# Altium PCB pcb.PCBDOC (part 4 of 4)
Units mil, origin at the board's own origin, x right, y up, seen from the top; angles counter-clockwise.
Board outline 6250 x 3000 mil, 6 copper layers (Top Layer, Internal Plane 1, Mid-Layer 1, Mid-Layer 2, Internal Plane 2, Bottom Layer); 189 components, 357 nets, 1696 pads, 997 vias.
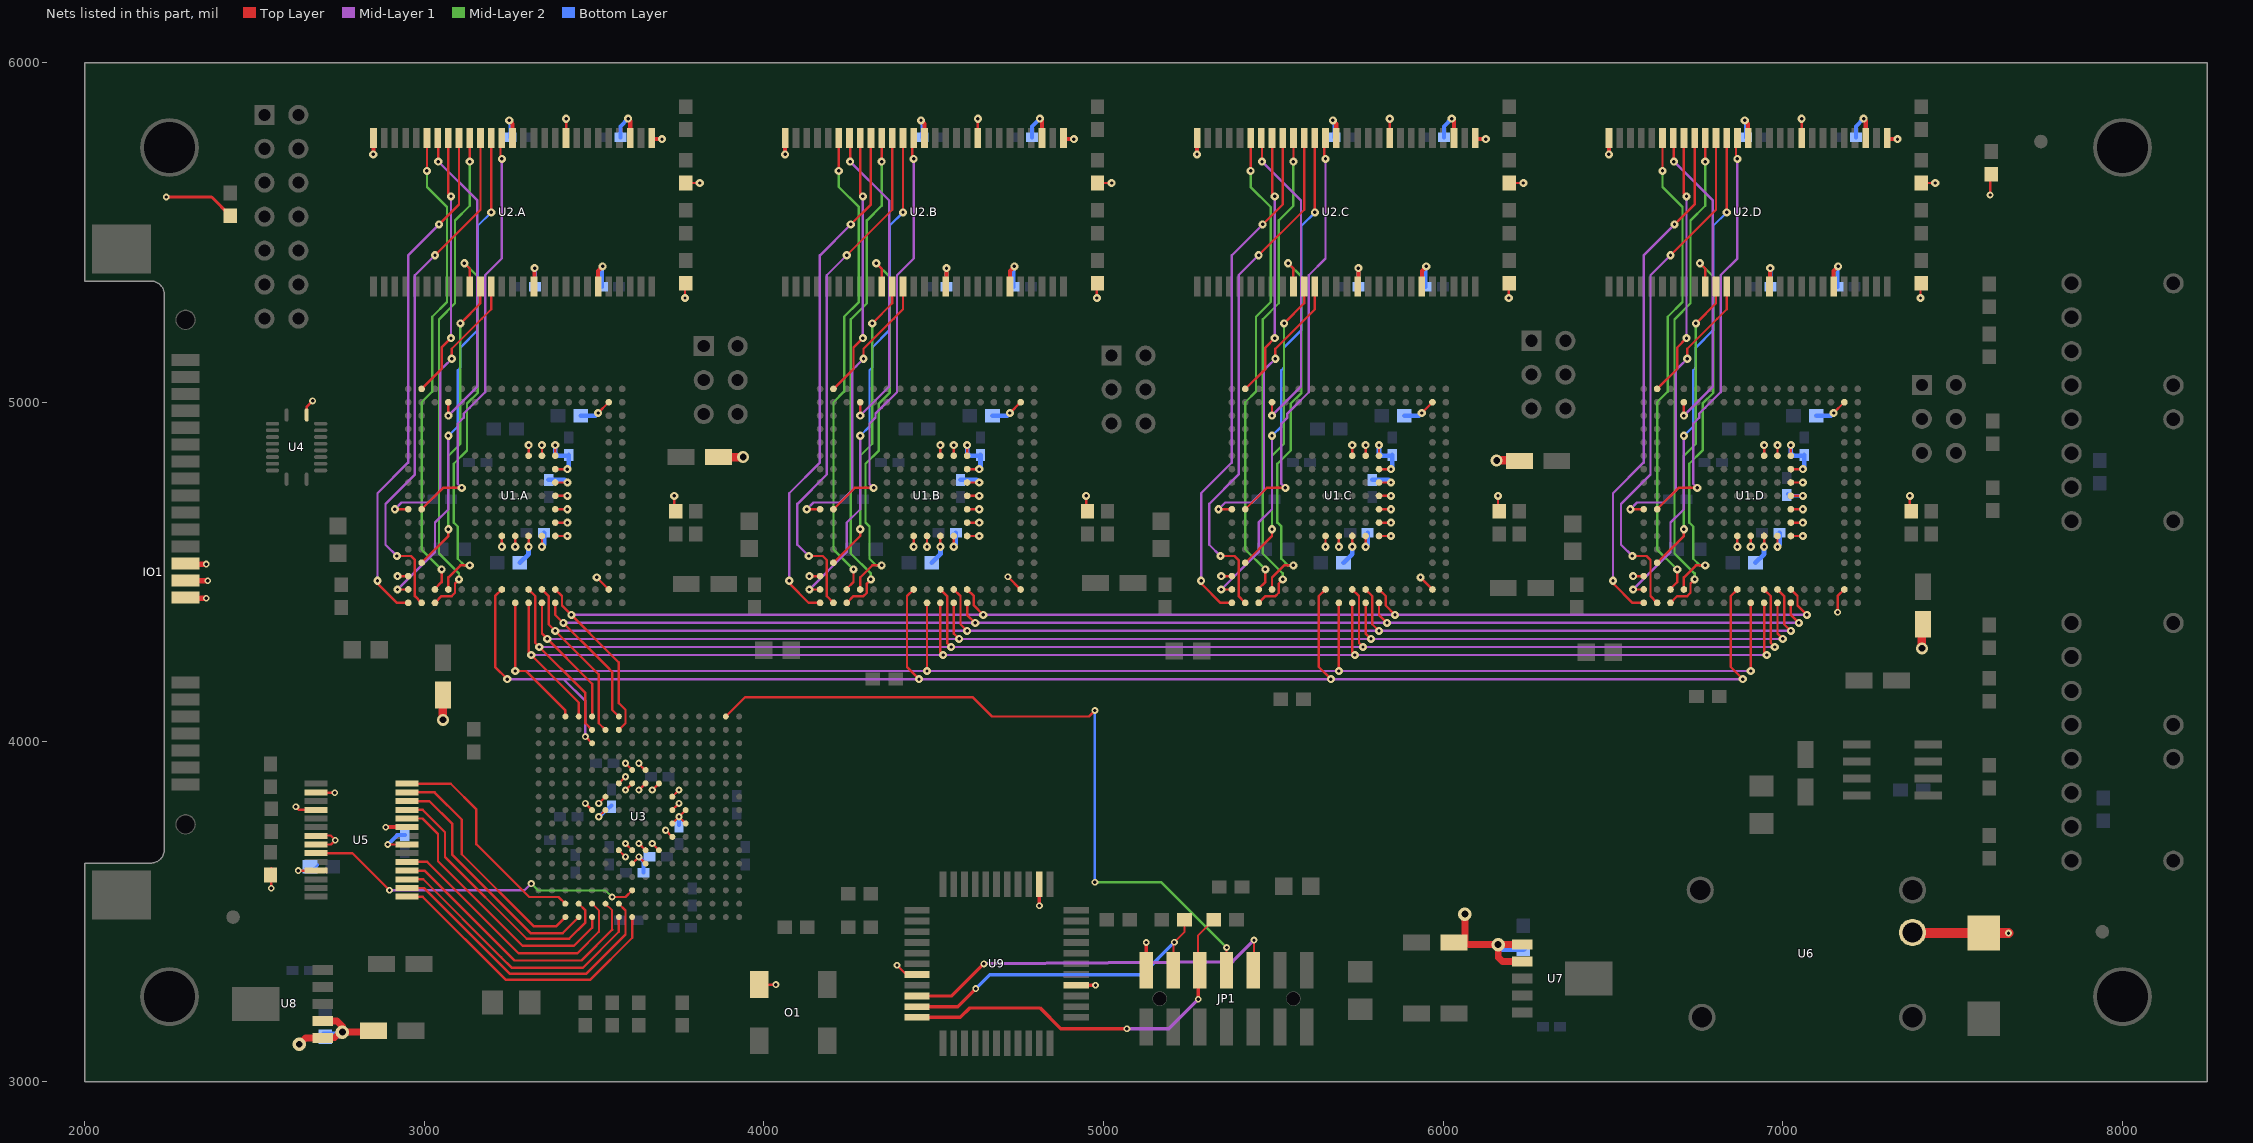
[diagram p8: the nets of this part, all layers, seen from the top]

## Via types
v1: diameter 24, hole 10, Top Layer to Bottom Layer, tented top, 281 vias
v2: diameter 24, hole 10, Top Layer to Bottom Layer, 250 vias
v3: diameter 20, hole 10, Top Layer to Bottom Layer, 211 vias
v4: diameter 21.2, hole 10, Top Layer to Bottom Layer, tented top, 109 vias
v5: diameter 20, hole 10, Top Layer to Bottom Layer, tented top, 96 vias
v6: diameter 40, hole 20, Top Layer to Bottom Layer, 25 vias
v7: diameter 25, hole 15, Top Layer to Bottom Layer, 9 vias
v8: diameter 35, hole 20, Top Layer to Bottom Layer, 8 vias
v9: diameter 40, hole 25, Top Layer to Bottom Layer, 8 vias

## Nets (pads, with @x,y where several pads share a name; then routed paths per layer and width w, separated by ;. In a path a pad name is that pad's centre, name@x,y a point inside that pad or via, vN(x,y) a via of type N, cw(c..) or ccw(c..) an arc to the next point about the centre after c; other vN are vias at no path point) (continued)
PPI1: U1.A.A9 U1.B.A9 U1.C.A9 U1.D.A9 U3.A3 | length 4654.4
  Top Layer w7: U1.A.A9@3267.72,4409.45 v2(3267.72,4208.66) 3299.21,4208.66 3415.35,4092.52 U3.A3@3415.35,4074.8 ; v2(4480.31,4208.66) U1.B.A9@4480.31,4409.45 ; v2(5692.91,4208.66) U1.C.A9@5692.91,4409.45 ; v2(6905.51,4208.66) U1.D.A9@6905.51,4409.45
  Mid-Layer 1 w7: v2(3267.72,4208.66) 3610.24,4208.66 v2(6905.51,4208.66)
PPI2: U1.A.B8 U1.B.B8 U1.C.B8 U1.D.B8 U3.B5 | length 4675.7
  Top Layer w7: U1.A.B8@3307.09,4448.82 3326.77,4429.13 3326.77,4291.34 3474.41,4143.7 3474.41,4055.12 U3.B5@3494.09,4035.43 ; U1.B.B8@4519.68,4448.82 4539.37,4429.13 4539.37,4291.34 v2(4551.18,4279.53) ; U1.C.B8@5732.28,4448.82 5751.97,4429.13 5751.97,4291.34 v2(5763.78,4279.53) ; U1.D.B8@6944.88,4448.82 6964.57,4429.13 6964.57,4291.34 v2(6976.38,4279.53)
  Mid-Layer 1 w7: v2(3338.58,4279.53) v2(6976.38,4279.53)
PPI3: U1.A.A8 U1.B.A8 U1.C.A8 U1.D.A8 U3.A4 | length 4504
  Top Layer w7: U1.A.A8@3307.09,4409.45 3307.09,4263.78 3454.72,4116.14 U3.A4@3454.72,4074.8 ; U1.B.A8@4519.68,4409.45 4519.68,4263.78 v2(4527.56,4255.91) ; U1.C.A8@5732.28,4409.45 5732.28,4263.78 v2(5740.16,4255.91) ; U1.D.A8@6944.88,4409.45 6944.88,4263.78 v2(6952.76,4255.91)
  Mid-Layer 1 w7: v2(3314.96,4255.91) v2(6952.76,4255.91)
PPI4: U1.A.B7 U1.B.B7 U1.C.B7 U1.D.B7 U3.B6 | length 4543.7
  Top Layer w7: U1.A.B7@3346.46,4448.82 3366.14,4429.13 3366.14,4346.46 3513.78,4198.82 3513.78,4055.12 U3.B6@3533.46,4035.43 ; U1.B.B7@4559.05,4448.82 4578.74,4429.13 4578.74,4346.46 v2(4598.43,4326.77) ; U1.C.B7@5771.65,4448.82 5791.34,4429.13 5791.34,4346.46 v2(5811.02,4326.77) ; U1.D.B7@6984.25,4448.82 7003.94,4429.13 7003.94,4346.46 v2(7023.62,4326.77)
  Mid-Layer 1 w7: v2(3385.83,4326.77) v2(7023.62,4326.77)
PPI5: U1.A.A7 U1.B.A7 U1.C.A7 U1.D.A7 U3.A5 | length 4372.1
  Top Layer w7: U1.A.A7@3346.46,4409.45 3346.46,4318.9 3494.09,4171.26 U3.A5@3494.09,4074.8 ; U1.B.A7@4559.05,4409.45 4559.06,4318.9 v2(4574.8,4303.15) ; U1.C.A7@5771.65,4409.45 5771.65,4318.9 v2(5787.4,4303.15) ; U1.D.A7@6984.25,4409.45 6984.25,4318.9 v2(7000,4303.15)
  Mid-Layer 1 w7: v2(3362.2,4303.15) v2(7000,4303.15)
PPI6: U1.A.B6 U1.B.B6 U1.C.B6 U1.D.B6 U3.B7 | length 4428.1
  Top Layer w7: U1.A.B6@3385.83,4448.82 3405.51,4429.13 3405.51,4401.57 3572.83,4234.25 3572.83,4114.17 3592.52,4094.49 3592.52,4055.12 U3.B7@3572.83,4035.43 ; U1.B.B6@4598.42,4448.82 4618.11,4429.13 4618.11,4401.57 v1(4645.67,4374.02) ; U1.C.B6@5811.02,4448.82 5830.71,4429.13 5830.71,4401.57 v1(5858.27,4374.02) ; U1.D.B6@7023.62,4448.82 7043.31,4429.13 7043.31,4401.57 v1(7070.87,4374.02)
  Mid-Layer 1 w7: v1(3433.07,4374.02) v1(7070.87,4374.02)
PPI7: U1.A.A6 U1.B.A6 U1.C.A6 U1.D.A6 U3.A7 | length 4256.4
  Top Layer w7: U1.A.A6@3385.83,4409.45 3385.83,4374.02 3539.44,4220.41 3553.15,4206.69 3553.15,4094.49 U3.A7@3572.83,4074.8 ; U1.B.A6@4598.42,4409.45 4598.42,4374.02 v1(4622.05,4350.39) ; U1.C.A6@5811.02,4409.45 5811.02,4374.02 v2(5834.65,4350.39) ; U1.D.A6@7023.62,4409.45 7023.62,4374.02 v1(7047.24,4350.39)
  Mid-Layer 1 w7: v1(3409.45,4350.39) v1(7047.24,4350.39)
PPICLK: U1.A.B10 U1.B.B10 U1.C.B10 U1.D.B10 U3.C5 | length 5008.3
  Top Layer w7: U1.A.B10@3228.35,4448.82 3208.66,4429.13 3208.66,4220.47 v2(3244.09,4185.04) ; v4(3474.41,4015.75) U3.C5@3494.09,3996.06 ; U1.B.B10@4440.94,4448.82 4421.26,4429.13 4421.26,4220.47 v2(4456.69,4185.04) ; U1.C.B10@5653.54,4448.82 5633.86,4429.13 5633.86,4220.47 v2(5669.29,4185.04) ; U1.D.B10@6866.14,4448.82 6846.46,4429.13 6846.46,4220.47 v2(6881.89,4185.04)
  Mid-Layer 1 w7: v2(3244.09,4185.04) v2(6881.89,4185.04) ; 3409.45,4185.04 3474.41,4120.08 v4(3474.41,4015.75)
RXCLK: U3.P8 U5.9 | length 1009
  Top Layer w7: U5.9@2681.1,3672.24 2788.39,3672.24 v3(2897.64,3562.99) ; v4(3553.15,3543.31) 3592.52,3543.31 U3.P8@3612.2,3562.99
  Mid-Layer 1 w7: v3(2897.64,3562.99) 3289.37,3562.99 3295.28,3562.99 v4(3314.96,3582.68)
  Mid-Layer 2 w6: 3334.65,3562.99 3533.47,3562.99 v4(3553.15,3543.31)
  Mid-Layer 2 w7: v4(3314.96,3582.68) 3334.65,3562.99
RXDAT0: U3.R3 U5.28 | length 672.9
  Top Layer w7: U5.28@2948.82,3876.97 3077.76,3876.97 3153.54,3801.18 3153.54,3698.82 3309.06,3543.31 3395.67,3543.31 U3.R3@3415.35,3523.62
RXDAT1: U3.T3 U5.27 | length 701.4
  Top Layer w7: U5.27@2948.82,3851.38 3030.51,3851.38 3110.24,3771.65 3110.24,3669.29 3322.83,3456.69 3387.8,3456.69 U3.T3@3415.35,3484.25
RXDAT2: U3.T4 U5.26 | length 739.6
  Top Layer w7: U5.26@2948.82,3825.79 3014.76,3825.79 3082.68,3757.87 3082.68,3667.32 3312.99,3437.01 3407.48,3437.01 U3.T4@3454.72,3484.25
RXDAT3: U3.R4 U5.25 | length 808.6
  Top Layer w7: U5.25@2948.82,3800.2 2995.08,3800.2 3061.02,3734.25 3061.02,3661.42 3301.84,3420.6 3426.51,3420.6 3474.41,3468.5 3474.41,3503.94 U3.R4@3454.72,3523.62
RXDAT4: U3.T5 U5.24 | length 801.4
  Top Layer w7: U5.24@2948.82,3774.61 2995.08,3774.61 3040.48,3729.21 3040.48,3648.5 3289.37,3399.61 3440.94,3399.61 3494.09,3452.76 U3.T5@3494.09,3484.25
RXDAT5: U3.R5 U5.19 | length 793.2
  Top Layer w6: U3.R5@3494.09,3523.62 3513.78,3503.94 3513.78,3440.94
  Top Layer w7: U5.19@2948.82,3646.65 3008.86,3646.65 3277.56,3377.95 3450.79,3377.95 3513.78,3440.94
RXDAT6: U3.R6 U5.18 | length 836.4
  Top Layer w6: U3.R6@3533.46,3523.62 3553.15,3503.94 3553.15,3446.85
  Top Layer w7: U5.18@2948.82,3621.06 3000.98,3621.06 3265.75,3356.3 3462.6,3356.3 3553.15,3446.85
RXDAT7: U3.T7 U5.17 | length 819.4
  Top Layer w7: U5.17@2948.82,3595.47 2997.05,3595.47 3226.38,3366.14 3257.87,3334.65 3466.54,3334.65 3572.83,3440.94 U3.T7@3572.83,3484.25
RXDAT8: U3.R7 U5.16 | length 895.3
  Top Layer w7: U5.16@2948.82,3569.88 2999.02,3569.88 3251.97,3316.93 3476.38,3316.93 3592.52,3433.07 3592.52,3503.94 U3.R7@3572.83,3523.62
RXDAT9: U3.T8 U5.15 | length 877.3
  Top Layer w7: U5.15@2948.82,3544.29 2995.08,3544.29 3240.16,3299.21 3488.19,3299.21 3612.2,3423.23 U3.T8@3612.2,3484.25
S\C\A\S\.A: U1.A.A16 U2.A.17 | length 1553.2
  Top Layer w7: v1(2919.29,4547.24) 2960.63,4547.24 2972.44,4535.43 2972.44,4429.13 U1.A.A16@2992.13,4409.45 ; v2(3031.5,5433.07) 3165.51,5567.09 U2.A.17@3165.51,5778.5
  Mid-Layer 1 w7: v1(2919.29,4547.24) 2885.83,4580.71 2885.83,4700.79 2972.44,4787.4 2972.44,5374.02 v2(3031.5,5433.07)
S\C\A\S\.B: U1.B.A16 U2.B.17 | length 1553.2
  Top Layer w7: v1(4131.89,4547.24) 4173.23,4547.24 4185.04,4535.43 4185.04,4429.13 U1.B.A16@4204.72,4409.45 ; v2(4244.09,5433.07) 4378.11,5567.09 U2.B.17@4378.11,5778.5
  Mid-Layer 1 w7: v1(4131.89,4547.24) 4098.43,4580.71 4098.43,4700.79 4185.04,4787.4 4185.04,5374.02 v2(4244.09,5433.07)
S\C\A\S\.C: U1.C.A16 U2.C.17 | length 1553.2
  Top Layer w7: v1(5344.49,4547.24) 5385.83,4547.24 5397.64,4535.43 5397.64,4429.13 U1.C.A16@5417.32,4409.45 ; v2(5456.69,5433.07) 5590.71,5567.09 U2.C.17@5590.71,5778.5
  Mid-Layer 1 w7: v1(5344.49,4547.24) 5311.02,4580.71 5311.02,4700.79 5397.64,4787.4 5397.64,5374.02 v2(5456.69,5433.07)
S\C\A\S\.D: U1.D.A16 U2.D.17 | length 1553.2
  Top Layer w7: v1(6557.09,4547.24) 6598.43,4547.24 6610.24,4535.43 6610.24,4429.13 U1.D.A16@6629.92,4409.45 ; v2(6669.29,5433.07) 6803.31,5567.09 U2.D.17@6803.31,5778.5
  Mid-Layer 1 w7: v1(6557.09,4547.24) 6523.62,4580.71 6523.62,4700.79 6610.24,4787.4 6610.24,5374.02 v2(6669.29,5433.07)
S\C\K\E\.A: U1.A.B14 U2.A.37 | length 1155
  Top Layer w7: U1.A.B14@3070.87,4448.82 3070.87,4484.25 3106.3,4519.69 v1(3133.86,4519.69) ; v2(3118.11,5409.45) 3133.86,5393.7 U2.A.37@3133.86,5342.52
  Mid-Layer 2 w7: v2(3118.11,5409.45) 3157.48,5370.08 3157.48,5027.56 3125.98,4996.06 3125.98,4858.27 3086.61,4818.9 3086.61,4645.67 3098.43,4633.86 3098.43,4539.37 3118.11,4519.69 v1(3133.86,4519.69) ; v1@3132.87,4518.7 v1@3135.83,4515.75
S\C\K\E\.B: U1.B.B14 U2.B.37 | length 1155
  Top Layer w7: U1.B.B14@4283.46,4448.82 4283.46,4484.25 4318.9,4519.69 v1(4346.46,4519.69) ; v2(4330.71,5409.45) 4346.46,5393.7 U2.B.37@4346.46,5342.52
  Mid-Layer 2 w7: v2(4330.71,5409.45) 4370.08,5370.08 4370.08,5027.56 4338.58,4996.06 4338.58,4858.27 4299.21,4818.9 4299.21,4645.67 4311.02,4633.86 4311.02,4539.37 4330.71,4519.69 v1(4346.46,4519.69) ; v1@4345.47,4518.7 v1@4348.43,4515.75
S\C\K\E\.C: U1.C.B14 U2.C.37 | length 1155
  Top Layer w7: U1.C.B14@5496.06,4448.82 5496.06,4484.25 5531.5,4519.69 v1(5559.06,4519.69) ; v2(5543.31,5409.45) 5559.06,5393.7 U2.C.37@5559.06,5342.52
  Mid-Layer 2 w7: v2(5543.31,5409.45) 5582.68,5370.08 5582.68,5027.56 5551.18,4996.06 5551.18,4858.27 5511.81,4818.9 5511.81,4645.67 5523.62,4633.86 5523.62,4539.37 5543.31,4519.69 v1(5559.06,4519.69) ; v1@5558.07,4518.7 v1@5561.02,4515.75
S\C\K\E\.D: U1.D.B14 U2.D.37 | length 1155
  Top Layer w7: U1.D.B14@6708.66,4448.82 6708.66,4484.25 6744.09,4519.69 v1(6771.65,4519.69) ; v2(6755.91,5409.45) 6771.65,5393.7 U2.D.37@6771.65,5342.52
  Mid-Layer 2 w7: v2(6755.91,5409.45) 6795.28,5370.08 6795.28,5027.56 6763.78,4996.06 6763.78,4858.27 6724.41,4818.9 6724.41,4645.67 6736.22,4633.86 6736.22,4539.37 6755.91,4519.69 v1(6771.65,4519.69) ; v1@6770.67,4518.7 v1@6773.62,4515.75
S\M\S\.A: U1.A.A17 U2.A.19 | length 1530.8
  Top Layer w7: v2@2864.17,4480.31 2864.17,4464.57 2919.29,4409.45 U1.A.A17@2952.76,4409.45 ; v2(3043.31,5523.62) 3102.36,5582.68 3102.36,5778.35 U2.A.19@3102.52,5778.5
  Mid-Layer 1 w7: v2(2862.2,4474.41) 2862.2,4732.28 2952.28,4822.35 2952.28,5432.59 v2(3043.31,5523.62)
S\M\S\.B: U1.B.A17 U2.B.19 | length 1530.8
  Top Layer w7: v2@4076.77,4480.31 4076.77,4464.57 4131.89,4409.45 U1.B.A17@4165.35,4409.45 ; v2(4255.91,5523.62) 4314.96,5582.68 4314.96,5778.35 U2.B.19@4315.12,5778.5
  Mid-Layer 1 w7: v2(4074.8,4474.41) 4074.8,4732.28 4164.87,4822.35 4164.87,5432.59 v2(4255.91,5523.62)
S\M\S\.C: U1.C.A17 U2.C.19 | length 1530.8
  Top Layer w7: v2@5289.37,4480.31 5289.37,4464.57 5344.49,4409.45 U1.C.A17@5377.95,4409.45 ; v2(5468.5,5523.62) 5527.56,5582.68 5527.56,5778.35 U2.C.19@5527.72,5778.5
  Mid-Layer 1 w7: v2(5287.4,4474.41) 5287.4,4732.28 5377.47,4822.35 5377.47,5432.59 v2(5468.5,5523.62)
S\M\S\.D: U1.D.A17 U2.D.19 | length 1530.8
  Top Layer w7: v1@6501.97,4480.31 6501.97,4464.57 6557.09,4409.45 U1.D.A17@6590.55,4409.45 ; v2(6681.1,5523.62) 6740.16,5582.68 6740.16,5778.35 U2.D.19@6740.32,5778.5
  Mid-Layer 1 w7: v1(6500,4474.41) 6500,4732.28 6590.07,4822.35 6590.07,5432.59 v2(6681.1,5523.62)
S\R\A\S\.A: U1.A.A15 U2.A.18 | length 1481.5
  Top Layer w7: U1.A.A15@3031.5,4409.45 3051.18,4429.13 3080.71,4429.13 3090.55,4438.98 3090.55,4466.54 v1(3102.36,4478.35) ; v2@3134.02,5708.82 U2.A.18@3134.02,5778.5
  Mid-Layer 2 w7: v1@3098.43,4478.35 v1(3102.36,4478.35) 3102.36,4496.06 3043.31,4555.12 3043.31,5244.09 3090.55,5291.34 3090.55,5535.43 3133.86,5578.74 v2(3133.86,5708.66)
S\R\A\S\.B: U1.B.A15 U2.B.18 | length 1481.5
  Top Layer w7: U1.B.A15@4244.09,4409.45 4263.78,4429.13 4293.31,4429.13 4303.15,4438.98 4303.15,4466.54 v1(4314.96,4478.35) ; v2@4346.61,5708.82 U2.B.18@4346.61,5778.5
  Mid-Layer 2 w7: v1@4311.02,4478.35 v1(4314.96,4478.35) 4314.96,4496.06 4255.91,4555.12 4255.91,5244.09 4303.15,5291.34 4303.15,5535.43 4346.46,5578.74 v2(4346.46,5708.66)
S\R\A\S\.C: U1.C.A15 U2.C.18 | length 1481.5
  Top Layer w7: U1.C.A15@5456.69,4409.45 5476.38,4429.13 5505.91,4429.13 5515.75,4438.98 5515.75,4466.54 v1(5527.56,4478.35) ; v2@5559.21,5708.82 U2.C.18@5559.21,5778.5
  Mid-Layer 2 w7: v1@5523.62,4478.35 v1(5527.56,4478.35) 5527.56,4496.06 5468.5,4555.12 5468.5,5244.09 5515.75,5291.34 5515.75,5535.43 5559.06,5578.74 v2(5559.06,5708.66)
S\R\A\S\.D: U1.D.A15 U2.D.18 | length 1481.5
  Top Layer w7: U1.D.A15@6669.29,4409.45 6688.98,4429.13 6718.5,4429.13 6728.35,4438.98 6728.35,4466.54 v1(6740.16,4478.35) ; v2@6771.81,5708.82 U2.D.18@6771.81,5778.5
  Mid-Layer 2 w7: v1@6736.22,4478.35 v1(6740.16,4478.35) 6740.16,4496.06 6681.1,4555.12 6681.1,5244.09 6728.35,5291.34 6728.35,5535.43 6771.65,5578.74 v2(6771.65,5708.66)
S\W\E\.A: U1.A.B17 U2.A.16 | length 1475.4
  Top Layer w7: v1(2921.26,4448.82) U1.A.B17@2952.76,4448.82 ; v2(3197.01,5559.21) U2.A.16@3197.01,5778.5
  Mid-Layer 1 w7: v1(2921.26,4448.82) 3031.5,4559.05 3031.5,4645.67 3070.87,4685.04 v1(3070.87,4901.57)
  Bottom Layer w7: v1(3070.87,4901.57) 3098.43,4929.13 3098.43,5094.49 3106.3,5102.36 3106.3,5161.42 3157.48,5212.6 3157.48,5519.69 v2(3197.01,5559.21)
S\W\E\.B: U1.B.B17 U2.B.16 | length 1475.4
  Top Layer w7: v1(4133.86,4448.82) U1.B.B17@4165.35,4448.82 ; v2(4409.61,5559.21) U2.B.16@4409.61,5778.5
  Mid-Layer 1 w7: v1(4133.86,4448.82) 4244.09,4559.05 4244.09,4645.67 4283.46,4685.04 v1(4283.46,4901.57)
  Bottom Layer w7: v1(4283.46,4901.57) 4311.02,4929.13 4311.02,5094.49 4318.9,5102.36 4318.9,5161.42 4370.08,5212.6 4370.08,5519.69 v2(4409.61,5559.21)
S\W\E\.C: U1.C.B17 U2.C.16 | length 1475.4
  Top Layer w7: v1(5346.46,4448.82) U1.C.B17@5377.95,4448.82 ; v2(5622.2,5559.21) U2.C.16@5622.2,5778.5
  Mid-Layer 1 w7: v1(5346.46,4448.82) 5456.69,4559.05 5456.69,4645.67 5496.06,4685.04 v1(5496.06,4901.57)
  Bottom Layer w7: v1(5496.06,4901.57) 5523.62,4929.13 5523.62,5094.49 5531.5,5102.36 5531.5,5161.42 5582.68,5212.6 5582.68,5519.69 v2(5622.2,5559.21)
S\W\E\.D: U1.D.B17 U2.D.16 | length 1475.4
  Top Layer w7: v1(6559.06,4448.82) U1.D.B17@6590.55,4448.82 ; v2(6834.8,5559.21) U2.D.16@6834.8,5778.5
  Mid-Layer 1 w7: v1(6559.06,4448.82) 6669.29,4559.05 6669.29,4645.67 6708.66,4685.04 v1(6708.66,4901.57)
  Bottom Layer w7: v1(6708.66,4901.57) 6736.22,4929.13 6736.22,5094.49 6744.09,5102.36 6744.09,5161.42 6795.28,5212.6 6795.28,5519.69 v2(6834.8,5559.21)
SA10.A: U1.A.B15 U2.A.22 | length 1415.8
  Top Layer w7: v2(3007.87,5681.1) 3008.03,5681.26 U2.A.22@3008.03,5778.5 ; U1.A.B15@3031.5,4450.79 3051.18,4470.47 v1(3051.18,4507.87)
  Mid-Layer 2 w7: v2(3007.87,5681.1) 3007.87,5633.86 3066.93,5574.8 3066.93,5295.28 3023.62,5251.97 3023.62,5031.5 2992.13,5000 2992.13,4566.93 v1(3051.18,4507.87)
SA10.B: U1.B.B15 U2.B.22 | length 1415.8
  Top Layer w7: v2(4220.47,5681.1) 4220.63,5681.26 U2.B.22@4220.63,5778.5 ; U1.B.B15@4244.09,4450.79 4263.78,4470.47 v1(4263.78,4507.87)
  Mid-Layer 2 w7: v2(4220.47,5681.1) 4220.47,5633.86 4279.53,5574.8 4279.53,5295.28 4236.22,5251.97 4236.22,5031.5 4204.72,5000 4204.72,4566.93 v1(4263.78,4507.87)
SA10.C: U1.C.B15 U2.C.22 | length 1415.8
  Top Layer w7: v2(5433.07,5681.1) 5433.23,5681.26 U2.C.22@5433.23,5778.5 ; U1.C.B15@5456.69,4450.79 5476.38,4470.47 v1(5476.38,4507.87)
  Mid-Layer 2 w7: v2(5433.07,5681.1) 5433.07,5633.86 5492.13,5574.8 5492.13,5295.28 5448.82,5251.97 5448.82,5031.5 5417.32,5000 5417.32,4566.93 v1(5476.38,4507.87)
SA10.D: U1.D.B15 U2.D.22 | length 1415.8
  Top Layer w7: v2(6645.67,5681.1) 6645.83,5681.26 U2.D.22@6645.83,5778.5 ; U1.D.B15@6669.29,4450.79 6688.98,4470.47 v1(6688.98,4507.87)
  Mid-Layer 2 w7: v2(6645.67,5681.1) 6645.67,5633.86 6704.72,5574.8 6704.72,5295.28 6661.42,5251.97 6661.42,5031.5 6629.92,5000 6629.92,4566.93 v1(6688.98,4507.87)
SB0.A: U1.A.U16 U2.A.20 | length 778.2
  Top Layer w7: U1.A.U16@2992.13,5039.37 3051.18,5098.43 3051.18,5161.42 v2(3078.74,5188.98) ; U2.A.20@3071.02,5778.5 3071.02,5614.02 v2(3078.74,5606.3)
  Mid-Layer 1 w7: v2(3078.74,5188.98) v2(3078.74,5606.3)
SB0.B: U1.B.U16 U2.B.20 | length 778.2
  Top Layer w7: U1.B.U16@4204.72,5039.37 4263.78,5098.43 4263.78,5161.42 v2(4291.34,5188.98) ; U2.B.20@4283.62,5778.5 4283.62,5614.02 v2(4291.34,5606.3)
  Mid-Layer 1 w7: v2(4291.34,5188.98) v2(4291.34,5606.3)
SB0.C: U1.C.U16 U2.C.20 | length 778.2
  Top Layer w7: U1.C.U16@5417.32,5039.37 5476.38,5098.43 5476.38,5161.42 v2(5503.94,5188.98) ; U2.C.20@5496.22,5778.5 5496.22,5614.02 v2(5503.94,5606.3)
  Mid-Layer 1 w7: v2(5503.94,5188.98) v2(5503.94,5606.3)
SB0.D: U1.D.U16 U2.D.20 | length 778.2
  Top Layer w7: U1.D.U16@6629.92,5039.37 6688.98,5098.43 6688.98,5161.42 v2(6716.54,5188.98) ; U2.D.20@6708.82,5778.5 6708.82,5614.02 v2(6716.54,5606.3)
  Mid-Layer 1 w7: v2(6716.54,5188.98) v2(6716.54,5606.3)
SB1.A: U1.A.T14 U2.A.21 | length 949.1
  Top Layer w7: v2(3041.34,5708.66) U2.A.21@3041.34,5787.4 ; v1(3070.87,4960.63) U1.A.T14@3070.87,5000
  Mid-Layer 1 w7: v2(3041.34,5708.66) 3156.29,5593.71 3156.29,5046.06 v1(3070.87,4960.63)
SB1.B: U1.B.T14 U2.B.21 | length 949.1
  Top Layer w7: v2(4253.94,5708.66) U2.B.21@4253.94,5787.4 ; v1(4283.46,4960.63) U1.B.T14@4283.46,5000
  Mid-Layer 1 w7: v2(4253.94,5708.66) 4368.89,5593.71 4368.89,5046.06 v1(4283.46,4960.63)
SB1.C: U1.C.T14 U2.C.21 | length 949.1
  Top Layer w7: v2(5466.54,5708.66) U2.C.21@5466.54,5787.4 ; v1(5496.06,4960.63) U1.C.T14@5496.06,5000
  Mid-Layer 1 w7: v2(5466.54,5708.66) 5581.49,5593.71 5581.49,5046.06 v1(5496.06,4960.63)
SB1.D: U1.D.T14 U2.D.21 | length 949.1
  Top Layer w7: v2(6679.13,5708.66) U2.D.21@6679.13,5787.4 ; v1(6708.66,4960.63) U1.D.T14@6708.66,5000
  Mid-Layer 1 w7: v2(6679.13,5708.66) 6794.09,5593.71 6794.09,5046.06 v1(6708.66,4960.63)
SCLK.A: U1.A.D16 U2.A.38 | length 886.7
  Top Layer w7: U1.A.D16@2992.13,4527.56 3070.87,4606.3 v1(3070.87,4625.98) ; v2(3106.3,5232.28) 3165.35,5291.34 U2.A.38@3165.35,5342.52
  Mid-Layer 2 w7: v1(3070.87,4625.98) 3070.87,4842.52 3106.3,4877.95 v2(3106.3,5232.28)
SCLK.B: U1.B.D16 U2.B.38 | length 886.7
  Top Layer w7: U1.B.D16@4204.72,4527.56 4283.46,4606.3 v1(4283.46,4625.98) ; v2(4318.9,5232.28) 4377.95,5291.34 U2.B.38@4377.95,5342.52
  Mid-Layer 2 w7: v1(4283.46,4625.98) 4283.46,4842.52 4318.9,4877.95 v2(4318.9,5232.28)
SCLK.C: U1.C.D16 U2.C.38 | length 886.7
  Top Layer w7: U1.C.D16@5417.32,4527.56 5496.06,4606.3 v1(5496.06,4625.98) ; v2(5531.5,5232.28) 5590.55,5291.34 U2.C.38@5590.55,5342.52
  Mid-Layer 2 w7: v1(5496.06,4625.98) 5496.06,4842.52 5531.5,4877.95 v2(5531.5,5232.28)
SCLK.D: U1.D.D16 U2.D.38 | length 886.7
  Top Layer w7: U1.D.D16@6629.92,4527.56 6708.66,4606.3 v1(6708.66,4625.98) ; v2(6744.09,5232.28) 6803.15,5291.34 U2.D.38@6803.15,5342.52
  Mid-Layer 2 w7: v1(6708.66,4625.98) 6708.66,4842.52 6744.09,4877.95 v2(6744.09,5232.28)
SDQM0.A: U1.A.H16 U2.A.15 | length 1240
  Top Layer w7: U1.A.H16@2992.13,4685.04 3055.12,4748.03 v1(3110.24,4748.03) ; U2.A.15@3224.41,5783.46 3224.41,5720.47 v2(3228.35,5716.54)
  Mid-Layer 1 w7: v1(3110.24,4748.03) 3098.43,4759.84 3098.43,4937.01 3116.13,4954.71 3116.13,4966.52 3133.86,4984.25 3179.13,5029.53 3179.13,5374.02 3228.35,5423.23 v2(3228.35,5716.54)
SDQM0.B: U1.B.H16 U2.B.15 | length 1240
  Top Layer w7: U1.B.H16@4204.72,4685.04 4267.72,4748.03 v1(4322.83,4748.03) ; U2.B.15@4437.01,5783.46 4437.01,5720.47 v2(4440.94,5716.54)
  Mid-Layer 1 w7: v1(4322.83,4748.03) 4311.02,4759.84 4311.02,4937.01 4328.73,4954.71 4328.73,4966.52 4346.46,4984.25 4391.73,5029.53 4391.73,5374.02 4440.94,5423.23 v2(4440.94,5716.54)
SDQM0.C: U1.C.H16 U2.C.15 | length 1240
  Top Layer w7: U1.C.H16@5417.32,4685.04 5480.31,4748.03 v1(5535.43,4748.03) ; U2.C.15@5649.61,5783.46 5649.61,5720.47 v2(5653.54,5716.54)
  Mid-Layer 1 w7: v1(5535.43,4748.03) 5523.62,4759.84 5523.62,4937.01 5541.32,4954.71 5541.32,4966.52 5559.06,4984.25 5604.33,5029.53 5604.33,5374.02 5653.54,5423.23 v2(5653.54,5716.54)
SDQM0.D: U1.D.H16 U2.D.15 | length 1240
  Top Layer w7: U1.D.H16@6629.92,4685.04 6692.91,4748.03 v1(6748.03,4748.03) ; U2.D.15@6862.2,5783.46 6862.2,5720.47 v2(6866.14,5716.54)
  Mid-Layer 1 w7: v1(6748.03,4748.03) 6736.22,4759.84 6736.22,4937.01 6753.92,4954.71 6753.92,4966.52 6771.65,4984.25 6816.93,5029.53 6816.93,5374.02 6866.14,5423.23 v2(6866.14,5716.54)
SDQM1.A: U1.A.H17 U2.A.39 | length 859.4
  Top Layer w7: v1(2913.39,4685.04) U1.A.H17@2952.76,4685.04 ; v2(3080.71,5127.95) 3080.71,5157.48 3169.29,5246.06 3197.01,5273.78 U2.A.39@3197.01,5341.5
  Mid-Layer 1 w7: v1(2913.39,4685.04) 2933.07,4704.72 3011.81,4704.72 3047.24,4740.16 3047.24,5094.49 3059.13,5106.37 v2(3080.71,5127.95)
SDQM1.B: U1.B.H17 U2.B.39 | length 859.4
  Top Layer w7: v1(4125.98,4685.04) U1.B.H17@4165.35,4685.04 ; v2(4293.31,5127.95) 4293.31,5157.48 4381.89,5246.06 4409.61,5273.78 U2.B.39@4409.61,5341.5
  Mid-Layer 1 w7: v1(4125.98,4685.04) 4145.67,4704.72 4224.41,4704.72 4259.84,4740.16 4259.84,5094.49 4271.72,5106.37 v2(4293.31,5127.95)
SDQM1.C: U1.C.H17 U2.C.39 | length 859.4
  Top Layer w7: v1(5338.58,4685.04) U1.C.H17@5377.95,4685.04 ; v2(5505.91,5127.95) 5505.91,5157.48 5594.49,5246.06 5622.2,5273.78 U2.C.39@5622.2,5341.5
  Mid-Layer 1 w7: v1(5338.58,4685.04) 5358.27,4704.72 5437.01,4704.72 5472.44,4740.16 5472.44,5094.49 5484.32,5106.37 v2(5505.91,5127.95)
SDQM1.D: U1.D.H17 U2.D.39 | length 859.4
  Top Layer w7: v1(6551.18,4685.04) U1.D.H17@6590.55,4685.04 ; v2(6718.5,5127.95) 6718.5,5157.48 6807.09,5246.06 6834.8,5273.78 U2.D.39@6834.8,5341.5
  Mid-Layer 1 w7: v1(6551.18,4685.04) 6570.87,4704.72 6649.61,4704.72 6685.04,4740.16 6685.04,5094.49 6696.92,5106.37 v2(6718.5,5127.95)
TCK: JP1.6 R16.1 U9.11 | length 1164.2
  Top Layer w6: JP1.6@5283.46,3327.76 5277.56,3333.66 5277.56,3429.13 R16.1@5324.8,3476.38
  Top Layer w10: U9.11@4450.79,3188.98 4578.74,3188.98 4606.3,3216.54 4812.99,3216.54 4874.02,3155.51 v3(5068.9,3155.51) ; v3(5278.54,3242.13) 5278.54,3322.83 JP1.6@5287.4,3331.69
  Mid-Layer 1 w10: v3(5068.9,3155.51) 5191.93,3155.51 v3(5278.54,3242.13)
TDI: JP1.10 U9.9 | length 1156.5
  Top Layer w6: JP1.10@5440.94,3327.76 5442.91,3329.72 v3(5442.91,3416.34)
  Top Layer w10: U9.9@4450.79,3251.97 4553.15,3251.97 v3(4647.64,3346.46)
  Mid-Layer 1 w10: v3(4647.64,3346.46) 5379.92,3352.36 ; 5373.03,3346.46 v3(5442.91,3416.34)
TDO: JP1.8 U3.A15 | length 2181.4
  Top Layer w6: JP1.8@5362.2,3327.76 v3(5362.2,3394.69)
  Top Layer w7: U3.A15@3887.8,4074.8 3944.88,4131.89 4614.17,4131.89 4671.26,4074.8 4956.69,4074.8 v3(4974.41,4092.52)
  Mid-Layer 2 w7: v3(4974.41,3586.61) 5165.35,3586.61
  Mid-Layer 2 w8: 5165.35,3586.61 5170.28,3586.61 v3(5362.2,3394.69)
  Bottom Layer w7: v3(4974.41,3586.61) v3(4974.41,4092.52)
TMS: JP1.4 R19.2 U9.10 | length 1004.7
  Top Layer w6: JP1.4@5205.71,3323.82 5205.71,3407.48 v3@5210.19,3411.96 ; v3(5208.66,3410.43) 5238.19,3439.96 R19.2@5238.19,3476.38
  Top Layer w10: U9.10@4450.79,3220.47 4570.87,3220.47 v3(4624.02,3273.62)
  Bottom Layer w10: v3(4624.02,3273.62) 4665.35,3314.96 5113.19,3314.96 v3(5208.66,3410.43)
VCC: C5.A.2 C5.B.2 C5.C.2 C5.D.2 C6.A.2 C6.B.2 C6.C.2 C6.D.2 C9.A.2 C9.B.2 C9.C.2 C9.D.2 C10.A.2 C10.B.2 C10.C.2 C10.D.2 C11.2 C12.A.2 C12.B.2 C12.C.2 C12.D.2 C13.2 C14.2 C15.1 C17.1 C18.1 C19.1 C20.1 C26.1 C28.2 C29.1 C33.2 C34.2 C35.2 C36.2 C59.A.2 C59.B.2 C59.C.2 C59.D.2 C60.A.2 C60.B.2 C60.C.2 C60.D.2 C61.A.2 C61.B.2 C61.C.2 C61.D.2 C62.A.2 C62.B.2 C62.C.2 C62.D.2 IO1.P1 IO1.P2 IO1.P3 JP1.2 O1.4 R1.A.2 R1.B.2 R1.C.2 R1.D.2 R2.A.1 R2.B.1 R2.C.1 R2.D.1 R3.A.1 R3.B.1 R3.C.1 R3.D.1 R8.1 R18.2 R35.2 U1.A.B2 U1.A.C17 U1.A.F6 U1.A.F7 U1.A.F8 U1.A.F9 U1.A.F10 U1.A.G6 U1.A.H6 U1.A.J6 U1.A.K6 U1.A.L6 U1.A.M6 U1.A.M7 U1.A.M8 U1.A.T2 U1.B.B2 U1.B.C17 U1.B.F6 U1.B.F7 U1.B.F8 U1.B.F9 U1.B.F10 U1.B.G6 U1.B.H6 U1.B.J6 U1.B.K6 U1.B.L6 U1.B.M6 U1.B.M7 U1.B.M8 U1.B.T2 U1.C.B2 U1.C.C17 U1.C.F6 U1.C.F7 U1.C.F8 U1.C.F9 U1.C.F10 U1.C.G6 U1.C.H6 U1.C.J6 U1.C.K6 U1.C.L6 U1.C.M6 U1.C.M7 U1.C.M8 U1.C.T2 U1.D.B2 U1.D.C17 U1.D.F6 U1.D.F7 U1.D.F8 U1.D.F9 U1.D.F10 U1.D.G6 U1.D.H6 U1.D.J6 U1.D.K6 U1.D.L6 U1.D.M6 U1.D.M7 U1.D.M8 U1.D.T2 U2.A.1 U2.A.3 U2.A.9 U2.A.14 U2.A.27 U2.A.43 U2.A.49 U2.B.1 U2.B.3 U2.B.9 U2.B.14 U2.B.27 U2.B.43 U2.B.49 U2.C.1 U2.C.3 U2.C.9 U2.C.14 U2.C.27 U2.C.43 U2.C.49 U2.D.1 U2.D.3 U2.D.9 U2.D.14 U2.D.27 U2.D.43 U2.D.49 U3.E8 U3.E9 U3.F7 U3.F8 U3.F9 U3.F10 U3.G6 U3.G11 U3.H5 U3.H6 U3.H11 U3.H12 U3.J11 U3.J12 U3.K11 U3.L7 U3.L8 U3.L9 U3.L10 U3.M8 U3.M9 U4.20 U5.2 U5.4 U5.7 U5.8 U5.11 U5.21 U5.23 U6.2 U7.1 U7.2 U8.1 U8.2 U9.7 U9.26 U9.35 | length 9930.5
  Top Layer w7: v3(2549.21,3568.9) R8.1@2549.21,3627.95 ; v3(2622.05,3809.06) 2630.91,3800.2 U5.4@2681.1,3800.2 ; v3(2628.94,3621.06) U5.11@2681.1,3621.06 ; U4.20@2653.54,4962.6 2653.54,4986.22 v3(2671.26,5003.94) ; U5.8@2681.1,3697.83 2725.39,3697.83 v3(2738.19,3710.63) 2724.41,3724.41 U5.7@2681.1,3724.41 ; U5.2@2681.1,3850.39 v3(2736.22,3850.39) ; v3(2892.72,3697.83) U5.21@2948.82,3697.83 ; v1(2921.26,4488.19) U1.A.C17@2956.69,4488.19 ; v1(3228.35,4574.8) U1.A.F10@3228.35,4606.3 ; v1(3267.72,4574.8) U1.A.F9@3267.72,4606.3 ; v1(3307.09,4574.8) U1.A.F8@3307.09,4606.3 ; U1.A.M8@3307.09,4842.52 v1(3307.09,4874.02) ; v1(3346.46,4574.8) U1.A.F7@3346.46,4606.3 ; U1.A.M7@3346.46,4842.52 v1(3346.46,4874.02) ; U1.A.F6@3385.83,4606.3 v1(3421.26,4606.3) ; U1.A.G6@3385.83,4645.67 v1(3421.26,4645.67) ; U1.A.H6@3385.83,4685.04 v1(3421.26,4685.04) ; U1.A.J6@3385.83,4724.41 v1(3421.26,4724.41) ; U1.A.K6@3385.83,4763.78 v1(3421.26,4763.78) ; U1.A.L6@3385.83,4803.15 v1(3421.26,4803.15) ; U1.A.M6@3385.83,4842.52 v1(3385.83,4874.02) ; U2.A.9@3417.48,5778.5 v2(3417.48,5834.8) ; v4(3474.41,3818.9) U3.H5@3494.09,3799.21 ; v1(3507.87,4484.25) U1.A.B2@3543.31,4448.82 ; v1(3511.81,4968.5) U1.A.T2@3543.31,5000 ; v4(3513.78,3779.53) U3.H6@3533.46,3799.21 ; v4(3513.78,3818.9) U3.G6@3533.46,3838.58 ; U3.L7@3572.83,3681.1 v4(3592.52,3661.42) ; U3.F7@3572.83,3877.95 v4(3592.52,3897.64) ; v4(3592.52,3700.79) U3.L8@3612.2,3681.1 ; v4(3592.52,3858.27) U3.F8@3612.2,3877.95 ; v4(3592.52,3937.01) U3.E8@3612.2,3917.32 ; U3.M8@3612.2,3641.73 v4(3631.89,3661.42) U3.M9@3651.58,3641.73 ; v4@3629.92,3937.01 U3.E9@3651.57,3915.35 ; v4(3631.89,3700.79) U3.L9@3651.58,3681.1 ; v4(3631.89,3858.27) U3.F9@3651.58,3877.95 ; v4(3671.26,3700.79) U3.L10@3690.95,3681.1 ; v4(3671.26,3858.27) U3.F10@3690.95,3877.95 ; v4(3710.63,3740.16) U3.K11@3730.32,3720.47 ; U3.J11@3730.32,3759.84 v4(3750,3779.53) ; U3.H11@3730.32,3799.21 v4(3750,3818.9) ; U3.G11@3730.32,3838.58 v4(3750,3858.27) ; R1.A.2@3736.22,4677.17 v2(3736.22,4724.41) ; v2(3767.72,5307.09) R2.A.1@3767.72,5354.33 ; R3.A.1@3767.72,5645.67 v2(3811.02,5645.67) ; U3.J12@3769.69,3759.84 v4(3750,3779.53) ; U3.H12@3769.69,3799.21 v4(3750,3779.53) ; O1.4@3986.22,3285.43 v3(4035.43,3285.43) ; v1(4133.86,4488.19) U1.B.C17@4169.29,4488.19 ; v3(4391.73,3342.52) 4419.29,3314.96 U9.7@4450.79,3314.96 ; v1(4440.94,4574.8) U1.B.F10@4440.94,4606.3 ; v1(4480.31,4574.8) U1.B.F9@4480.31,4606.3 ; v1(4519.69,4574.8) U1.B.F8@4519.68,4606.3 ; U1.B.M8@4519.68,4842.52 v1(4519.68,4874.02) ; v1(4559.05,4574.8) U1.B.F7@4559.05,4606.3 ; U1.B.M7@4559.05,4842.52 v1(4559.05,4874.02) ; U1.B.F6@4598.42,4606.3 v1(4633.86,4606.3) ; U1.B.G6@4598.42,4645.67 v1(4633.86,4645.67) ; U1.B.H6@4598.42,4685.04 v1(4633.86,4685.04) ; U1.B.J6@4598.42,4724.41 v1(4633.86,4724.41) ; U1.B.K6@4598.42,4763.78 v1(4633.86,4763.78) ; U1.B.L6@4598.42,4803.15 v1(4633.86,4803.15) ; U1.B.M6@4598.42,4842.52 v1(4598.43,4874.02) ; U2.B.9@4630.08,5778.5 v2(4630.08,5834.8) ; v5(4718.5,4486.22) U1.B.B2@4755.9,4448.82 ; v1(4724.41,4968.5) U1.B.T2@4755.9,5000 ; R1.B.2@4948.82,4677.17 v2(4948.82,4724.41) ; v2(4980.31,5307.09) R2.B.1@4980.31,5354.33 ; R3.B.1@4980.31,5645.67 v2(5023.62,5645.67) ; v1(5346.46,4488.19) U1.C.C17@5381.89,4488.19 ; v1(5653.54,4574.8) U1.C.F10@5653.54,4606.3 ; v1(5692.91,4574.8) U1.C.F9@5692.91,4606.3 ; v1(5732.28,4574.8) U1.C.F8@5732.28,4606.3 ; U1.C.M8@5732.28,4842.52 v1(5732.28,4874.02) ; v1(5771.65,4574.8) U1.C.F7@5771.65,4606.3 ; U1.C.M7@5771.65,4842.52 v1(5771.65,4874.02) ; U1.C.F6@5811.02,4606.3 v1(5846.46,4606.3) ; U1.C.G6@5811.02,4645.67 v1(5846.46,4645.67) ; U1.C.H6@5811.02,4685.04 v1(5846.46,4685.04) ; U1.C.J6@5811.02,4724.41 v1(5846.46,4724.41) ; U1.C.K6@5811.02,4763.78 v1(5846.46,4763.78) ; U1.C.L6@5811.02,4803.15 v1(5846.46,4803.15) ; U1.C.M6@5811.02,4842.52 v1(5811.02,4874.02) ; U2.C.9@5842.68,5778.5 v2(5842.68,5834.8) ; v1(5933.07,4484.25) U1.C.B2@5968.5,4448.82 ; v1(5937.01,4968.5) U1.C.T2@5968.5,5000 ; R1.C.2@6161.42,4677.17 v2(6161.42,4724.41) ; v2(6192.91,5307.09) R2.C.1@6192.91,5354.33 ; R3.C.1@6192.91,5645.67 v2(6236.22,5645.67) ; v1(6559.06,4488.19) U1.D.C17@6594.49,4488.19 ; v1(6866.14,4574.8) U1.D.F10@6866.14,4606.3 ; v1(6905.51,4574.8) U1.D.F9@6905.51,4606.3 ; v1(6944.88,4574.8) U1.D.F8@6944.88,4606.3 ; U1.D.M8@6944.88,4842.52 v1(6944.88,4874.02) ; v1(6984.25,4574.8) U1.D.F7@6984.25,4606.3 ; U1.D.M7@6984.25,4842.52 v1(6984.25,4874.02) ; U1.D.F6@7023.62,4606.3 v1(7059.05,4606.3) ; U1.D.G6@7023.62,4645.67 v1(7059.05,4645.67) ; U1.D.H6@7023.62,4685.04 v1(7059.05,4685.04) ; U1.D.J6@7023.62,4724.41 v1(7059.06,4724.41) ; U1.D.K6@7023.62,4763.78 v1(7059.06,4763.78) ; U1.D.L6@7023.62,4803.15 v1(7059.05,4803.15) ; U1.D.M6@7023.62,4842.52 v1(7023.62,4874.02) ; U2.D.9@7055.28,5778.5 v2(7055.28,5834.8) ; v1(7149.61,4968.5) U1.D.T2@7181.1,5000 ; v5(7161.42,4381.89) 7161.42,4429.13 U1.D.B2@7181.1,4448.82 ; R1.D.2@7374.02,4677.17 v2(7374.02,4724.41) ; v2(7405.51,5307.09) R2.D.1@7405.51,5354.33 ; R3.D.1@7405.51,5645.67 v2(7448.82,5645.67) ; v3(7610.24,5610.24) R35.2@7610.24,5665.35
  Top Layer w9: v3(2240.16,5604.33) 2374.02,5604.33 R18.2@2429.13,5549.21
  Top Layer w10: v3(4811.02,3517.72) U9.35@4811.02,3580.71 ; U9.26@4919.29,3283.46 v3(4976.38,3283.46) ; JP1.2@5125.98,3326.77 v3(5125.98,3409.45)
  Top Layer w12: v2(2850,5730) U2.A.27@2850,5780 ; v3(2886.81,3749.02) U5.23@2948.82,3749.02 ; v2(3250,5830) 3260,5820 U2.A.14@3260,5778.5 ; U2.A.43@3322.99,5341.5 3325,5343.5 v2(3325,5395) ; U2.A.49@3511.97,5341.5 3511.97,5386.97 v2(3525,5400) ; v2(3600,5835) 3606.46,5828.54 U2.A.3@3606.46,5778.5 ; U2.A.1@3670,5775 v2(3700,5775) ; v2(4062.6,5730) U2.B.27@4062.6,5780 ; v2(4462.6,5830) 4472.6,5820 U2.B.14@4472.6,5778.5 ; U2.B.43@4535.59,5341.5 4537.6,5343.5 v2(4537.6,5395) ; U2.B.49@4724.57,5341.5 4724.57,5386.97 v2(4737.6,5400) ; v2(4812.6,5835) 4819.06,5828.54 U2.B.3@4819.06,5778.5 ; U2.B.1@4882.6,5775 v2(4912.6,5775) ; v2(5275.2,5730) U2.C.27@5275.2,5780 ; v2(5675.2,5830) 5685.2,5820 U2.C.14@5685.2,5778.5 ; U2.C.43@5748.19,5341.5 5750.2,5343.5 v2(5750.2,5395) ; U2.C.49@5937.17,5341.5 5937.17,5386.97 v2(5950.2,5400) ; v2(6025.2,5835) 6031.65,5828.54 U2.C.3@6031.65,5778.5 ; U2.C.1@6095.2,5775 v2(6125.2,5775) ; v2(6487.8,5730) U2.D.27@6487.8,5780 ; v2(6887.8,5830) 6897.8,5820 U2.D.14@6897.8,5778.5 ; U2.D.43@6960.79,5341.5 6962.8,5343.5 v2(6962.8,5395) ; U2.D.49@7149.76,5341.5 7149.76,5386.97 v2(7162.8,5400) ; v2(7237.8,5835) 7244.25,5828.54 U2.D.3@7244.25,5778.5 ; U2.D.1@7307.8,5775 v2(7337.8,5775)
  Top Layer w16: IO1.P2@2295.28,4474.41 v3(2362.2,4474.41) ; IO1.P1@2297.24,4423.23 v3(2358.27,4423.23) ; IO1.P3@2299.21,4523.62 v3(2358.27,4523.62)
  Top Layer w20: v6(2631.89,3110.04) 2650.2,3128.35 U8.1@2700.79,3128.35 ; U8.1@2698.82,3128.94 2736.22,3128.94 v6@2755.91,3148.62 ; U8.2@2700.79,3178.35 2742.91,3178.35 2758.86,3162.4 v6(2758.86,3145.67) C29.1@2852.36,3145.67 ; C15.1@6063.98,3407.48 v6(6063.98,3493.11) ; 6075.2,3403.15 U7.1@6232.28,3403.15 ; v6@6162.4,3398.62 6162.4,3365.16 6174.41,3353.15 U7.2@6232.28,3353.15
  Top Layer w25: v8(3055.12,4064.96) C17.1@3055.12,4133.86 ; C18.1@3868.11,4838.58 v8(3938.98,4838.58) ; v8(6157.48,4828.74) C19.1@6218.5,4828.74 ; v8(7409.45,4275.59) C20.1@7409.45,4346.46
  Top Layer w30: U6.2@7389.76,3437.01 v3(7664.37,3437.01)
  Mid-Layer 1 w7: v3(2736.22,3850.39) v3@2740.16,3854.33
  Bottom Layer w7: v3(2628.94,3621.06) 2670.28,3621.06 2687.01,3637.8
  Bottom Layer w10: C10.D.2@7013.78,4730.31 7019.69,4724.41 v1(7059.06,4724.41)
  Bottom Layer w12: v3(2892.72,3697.83) 2921.26,3726.38 C14.2@2942.91,3726.38 ; C60.A.2@3254.41,5780 v2@3254.41,5825.59 ; v2(3325,5395) 3325.59,5394.41 C61.A.2@3325.59,5340 ; v4(3513.78,3779.53) C36.2@3551.18,3812.99 ; C62.A.2@3522.66,5340 3522.66,5397.66 v2(3525,5400) ; C59.A.2@3577.34,5780 3577.34,5812.34 v2(3600,5835) ; v4(3631.89,3661.42) 3645.59,3647.72 C33.2@3645.59,3615 ; C34.2@3750,3755.91 v4(3750,3779.53) ; C60.B.2@4467.01,5780 v2@4467.01,5825.59 ; v2(4537.6,5395) 4538.19,5394.41 C61.B.2@4538.19,5340 ; C62.B.2@4735.26,5340 4735.26,5397.66 v2(4737.6,5400) ; C59.B.2@4789.94,5780 4789.94,5812.34 v2(4812.6,5835) ; C60.C.2@5679.61,5780 v2@5679.61,5825.59 ; v2(5750.2,5395) 5750.79,5394.41 C61.C.2@5750.79,5340 ; C62.C.2@5947.86,5340 5947.86,5397.66 v2(5950.2,5400) ; C59.C.2@6002.54,5780 6002.54,5812.34 v2(6025.2,5835) ; C60.D.2@6892.2,5780 v2@6892.2,5825.59 ; v2(6962.8,5395) 6963.39,5394.41 C61.D.2@6963.39,5340 ; C62.D.2@7160.46,5340 7160.46,5397.66 v2(7162.8,5400) ; C59.D.2@7215.13,5780 7215.13,5812.34 v2(7237.8,5835)
  Bottom Layer w14: C6.A.2@3281.5,4527.56 3307.09,4553.15 v1(3307.09,4574.8) ; v1(3346.46,4574.8) 3352.36,4580.71 C12.A.2@3352.36,4616.14 ; C10.A.2@3366.14,4771.59 3413.45,4771.59 v1(3421.26,4763.78) ; v1(3385.83,4874.02) 3385.83,4850.39 3393.7,4842.52 C9.A.2@3425.2,4842.52 ; v1@3425.2,4807.09 C9.A.2@3425.2,4844.55 ; C5.A.2@3460.57,4960.63 v1@3503.94,4960.63 ; C6.B.2@4494.09,4527.56 4519.69,4553.15 v1(4519.69,4574.8) ; v1(4559.05,4574.8) 4564.96,4580.71 C12.B.2@4564.96,4616.14 ; C10.B.2@4578.74,4771.59 4626.05,4771.59 v1(4633.86,4763.78) ; v1(4598.43,4874.02) 4598.43,4850.39 4606.3,4842.52 C9.B.2@4637.8,4842.52 ; v1@4637.8,4807.09 C9.B.2@4637.8,4844.55 ; C5.B.2@4673.17,4960.63 v1@4716.54,4960.63 ; C6.C.2@5706.69,4527.56 5732.28,4553.15 v1(5732.28,4574.8) ; v1(5771.65,4574.8) 5777.56,4580.71 C12.C.2@5777.56,4616.14 ; C10.C.2@5791.34,4771.59 5838.65,4771.59 v1(5846.46,4763.78) ; v1(5811.02,4874.02) 5811.02,4850.39 5818.9,4842.52 C9.C.2@5850.39,4842.52 ; v1@5850.39,4807.09 C9.C.2@5850.39,4844.55 ; C5.C.2@5885.76,4960.63 v1@5929.13,4960.63 ; C6.D.2@6919.29,4527.56 6944.88,4553.15 v1(6944.88,4574.8) ; v1(6984.25,4574.8) 6990.16,4580.71 C12.D.2@6990.16,4616.14 ; v1(7023.62,4874.02) 7023.62,4850.39 7031.5,4842.52 C9.D.2@7062.99,4842.52 ; v1@7062.99,4807.09 C9.D.2@7062.99,4844.55 ; C5.D.2@7098.36,4960.63 v1@7141.73,4960.63
  Bottom Layer w20: C28.2@2703.74,3136.81 2747.05,3136.81 v6@2760.83,3150.59 ; v6(6161.81,3403.15) 6173.23,3391.73 C11.2@6236.22,3391.73
  other v4: 3631.89,3937.01
pads on no net: FID1.0 FID2.0 FID3.0 IO1.0 IO1.P11 JP1.0 JP1.12 JP1.14 O1.1 U1.A.A2 U1.A.A3 U1.A.A4 U1.A.A5 U1.A.A11 U1.A.A13 U1.A.B3 U1.A.B5 U1.A.B12 U1.A.B13 U1.A.C2 U1.A.C16 U1.A.D17 U1.A.E16 U1.A.E17 U1.A.F2 U1.A.F16 U1.A.F17 U1.A.G16 U1.A.G17 U1.A.H2 U1.A.K1 U1.A.M1 U1.A.P1 U1.A.P17 U1.A.R1 U1.A.R16 U1.A.T13 U1.A.T15 U1.A.T17 U1.A.U15 U1.A.U17 U1.B.A2 U1.B.A3 U1.B.A4 U1.B.A5 U1.B.A11 U1.B.A13 U1.B.B3 U1.B.B5 U1.B.B12 U1.B.B13 U1.B.C2 U1.B.C16 U1.B.D17 U1.B.E16 U1.B.E17 U1.B.F2 U1.B.F16 U1.B.F17 U1.B.G16 U1.B.G17 U1.B.H2 U1.B.K1 U1.B.M1 U1.B.P1 U1.B.P17 U1.B.R1 U1.B.R16 U1.B.T13 U1.B.T15 U1.B.T17 U1.B.U15 U1.B.U17 U1.C.A2 U1.C.A3 U1.C.A4 U1.C.A5 U1.C.A11 U1.C.A13 U1.C.B3 U1.C.B5 U1.C.B12 U1.C.B13 U1.C.C2 U1.C.C16 U1.C.D17 U1.C.E16 U1.C.E17 U1.C.F2 U1.C.F16 U1.C.F17 U1.C.G16 U1.C.G17 U1.C.H2 U1.C.K1 U1.C.M1 U1.C.P1 U1.C.P17 U1.C.R1 U1.C.R16 U1.C.T13 U1.C.T15 U1.C.T17 U1.C.U15 U1.C.U17 U1.D.A2 U1.D.A3 U1.D.A4 U1.D.A5 U1.D.A11 U1.D.A13 U1.D.B3 U1.D.B5 U1.D.B12 U1.D.B13 U1.D.C2 U1.D.C16 U1.D.D17 U1.D.E16 U1.D.E17 U1.D.F2 U1.D.F16 U1.D.F17 U1.D.G16 U1.D.G17 U1.D.H2 U1.D.K1 U1.D.M1 U1.D.P1 U1.D.P17 U1.D.R1 U1.D.R16 U1.D.T13 U1.D.T15 U1.D.T17 U1.D.U15 U1.D.U17 U2.A.40 U2.B.40 U2.C.40 U2.D.40 U3.C4 U3.C9 U3.D6 U3.E3 U3.E4 U3.E10 U3.E13 U3.E14 U3.F14 U3.G3 U3.G4 U3.G5 U3.G14 U3.H1 U3.H3 U3.H4 U3.J3 U3.J4 U3.J14 U3.K1 U3.K2 U3.K3 U3.K4 U3.K5 U3.L2 U3.L3 U3.L4 U3.L5 U3.M1 U3.M2 U3.M3 U3.M4 U3.M7 U3.M10 U3.N1 U3.N2 U3.N3 U3.N5 U3.N6 U3.N7 U3.N8 U3.N11 U3.N12 U3.P1 U3.P2 U3.P3 U3.P4 U3.P5 U3.P7 U3.P9 U3.P11 U3.R1 U3.R10 U3.R11 U3.R12 U3.R13 U3.T2 U6.3 U9.2 U9.3 U9.5 U9.6 U9.12 U9.13 U9.14 U9.16 U9.18 U9.19 U9.20 U9.21 U9.22 U9.23 U9.27 U9.28 U9.29 U9.30 U9.31 U9.32 U9.33 U9.34 U9.41 U9.42 U9.43 U9.44
copper on no net:
  other v4: 3671.26,3937.01

## Polygon pours and split planes (outlines as drawn)
+2.5VCC on Top Layer (solid): 2646.63,3485.24 2646.63,3063.98 4439.96,3064.5 4439.96,3290.35 3091.69,3290.35 2896.61,3486.22 2641.73,3486.22
GND on Top Layer (solid): 2382.87,3425.2 2382.87,3049.21 2673.23,3049.21 2673.23,3512.8 2381.89,3512.8 2381.89,3422.24
GND on Top Layer (solid): 3149.61,4842.52 3149.61,4606.3 3385.83,4606.3 3385.83,4842.52
GND on Top Layer (solid): 3690.95,3837.12 3690.95,3720.47 3572.83,3720.47 3572.83,3838.58 3690.95,3838.58
GND on Top Layer (solid): 4362.2,4842.52 4362.2,4606.3 4598.42,4606.3 4598.42,4842.52
GND on Top Layer (solid): 5574.8,4842.52 5574.8,4606.3 5811.02,4606.3 5811.02,4842.52
GND on Top Layer (solid): 6787.4,4842.52 6787.4,4606.3 7023.62,4606.3 7023.62,4842.52
GND on Top Layer (solid): 6360.24,3601.38 6360.24,3061.02 6663.39,3061.02 6663.39,3592.52 6360.24,3592.52
+2.5VCC on Mid-Layer 1 (solid): 4283.46,4387.8 2393.7,4387.8 2393.7,3057.09 4281.19,3057.09 4281.19,4387.8
+2.5VCC on Mid-Layer 2 (solid): 4435.04,3057.09 4435.04,4399.61 2399.61,4399.61 2399.61,3057.09
+1.8VCC on Bottom Layer (solid): 6171.26,3352.36 4456.69,3352.36 4456.69,3049.21 6177.17,3049.21 6177.17,3352.36
+5VCC on Bottom Layer (solid): 8198.82,3068.9 7192.91,3070.87 7187.01,4040.35 7600.39,4299.21 7600.39,5799.21 2700.79,5799.21 2700.79,4738.19 2301.18,4738.19 2303.15,5950.79 8200.79,5952.76 8200.79,3399.61
+1.2VCC on Bottom Layer (solid): 7192.91,3070.87 2505.91,3068.9 2505.91,4719.89 2712.6,4719.89 2712.6,5791.34 7598.43,5791.34 7598.43,4295.69 7538.39,4295.28 7192.91,4072.83
GND on Internal Plane 1 (split plane): 2020.02,3020.01 2020.02,3623.09 2194.88,3623.09 ccw(c2194.88,3682.48) 2254.26,3682.48 2254.26,5317.52 ccw(c2194.88,5317.52) 2194.88,5376.9 2020.02,5376.9 2020.02,5979.98 8229.99,5979.98 8229.99,3020.01
VCC on Internal Plane 2 (split plane): 2020.02,3020.01 2020.02,3623.09 2194.88,3623.09 ccw(c2194.88,3682.48) 2254.26,3682.48 2254.26,5317.52 ccw(c2194.88,5317.52) 2194.88,5376.9 2020.02,5376.9 2020.02,5979.98 8229.99,5979.98 8229.99,3020.01

## Keep-outs
Keep-Out Layer:
  lines w10: 2050,3050 2050,5950 8200,5950 8200,3050 2050,3050

## Other copper
Top Layer:
  text "Layer 1" at 8354.33,4035.43 h60
Mid-Layer 1:
  text "Layer 3" at 8358.27,3838.58 h60
Mid-Layer 2:
  text "Layer 4" at 8358.27,3728.35 h60
Bottom Layer:
  text "Layer 6" at 8358.27,3531.5 h60
Internal Plane 1 (plane layer: these items are gaps in the copper):
  text "Layer 2" at 8356.3,3938.98 h60
Internal Plane 2 (plane layer: these items are gaps in the copper):
  text "Layer 5" at 8356.3,3622.05 h60

## Silkscreen, mask and mechanical layers (free items; w line width, h text height)
Top Overlay:
  rectangle: 5741.22,3722.01 5761.22,3822.01
  rectangle: 5771.22,3772.01 5791.22,3822.01
  rectangle: 5801.22,3722.01 5821.22,3822.01
  rectangle: 5861.22,3802.01 5911.22,3822.01
  rectangle: 5831.22,3722.01 5851.22,3792.01
  rectangle: 5831.22,3802.01 5851.22,3822.01
  rectangle: 5861.22,3722.01 5881.22,3792.01
  lines w10: 4246.06,3842.52 5909.45,3842.52
  text "DSP JTAG" at 2704.72,5811.02 h70 r270
  text "FIBER AB" at 7753.94,5460.63 h60
  text "DSP B" at 4297.24,5171.26 h70
  text "DSP C" at 5533.46,5167.32 h70
  text "DSP A" at 3114.17,5159.45 h70
  text "DSP D" at 6775.59,5159.45 h70
  text "UART-C" at 6178.15,4978.35 h40 r90
  text "UART-A" at 3749.02,4973.43 h40 r90
  text "UART-B" at 4945.15,4950.07 h40 r90
  text "UART-D" at 7336.61,4823.82 h40 r90
  text "FIBER CD" at 7750,4435.04 h60
  text "EVENT B" at 3907.48,4161.42 h40
  text "EVENT D" at 6326.77,4157.48 h40
  text "EVENT C" at 5114.17,4155.51 h40
  text "EVENT A" at 2712.6,4153.54 h40
  text "Soma DSP-4x" at 4261.22,3872.01 h120
  text "Copyright Eric Jonas" at 4251.22,3772.01 h45
  text "2007" at 5521.22,3762.01 h50
  text "Version 3.0.5" at 4251.22,3712.01 h30
  text "soma.mit.edu" at 5366.22,3707.01 h30
  text "POWER" at 5494.09,3628.94 h40
  text "FPGA JTAG" at 5434.06,3415.35 h40
  text "BOOT" at 4578.74,3372.05 h50
  text "CPLD" at 4572.83,3307.09 h50
Mechanical 4:
  lines w1: 3224.41,4169.29 3228.35,4169.29 3444.88,4385.83
Mechanical 5:
  the board outline again, w1

## Dimensions
2050,3050 to 8200,3050 on Mechanical 1
2050,3050 to 2050,5950 on Mechanical 1

## Text inside footprints (layer, text, board x,y; h text height)
IO1: Top Overlay "MOLEX 87703-0001" at 2452.24,3620 h30 r90
P1.A: Top Overlay "2" at 3902.83,5265.35 h50 r270; Top Overlay "1" at 3802.83,5245.35 h50 r270
P1.B: Top Overlay "2" at 5103.62,5237.8 h50 r270; Top Overlay "1" at 5003.62,5217.8 h50 r270
P1.C: Top Overlay "2" at 6339.84,5281.1 h50 r270; Top Overlay "1" at 6239.84,5261.1 h50 r270
P1.D: Top Overlay "2" at 7489.45,5151.18 h50 r270; Top Overlay "1" at 7389.45,5131.18 h50 r270